# Altium PCB Motor_Drive.PcbDoc (part 2 of 2)
Units mil, origin at the board's own origin, x right, y up, seen from the top; angles counter-clockwise.
Board outline 4300 x 3900 mil, 4 copper layers (Top Layer, Power Plane, Ground Layer, Bottom Layer); 203 components, 137 nets, 620 pads, 244 vias.
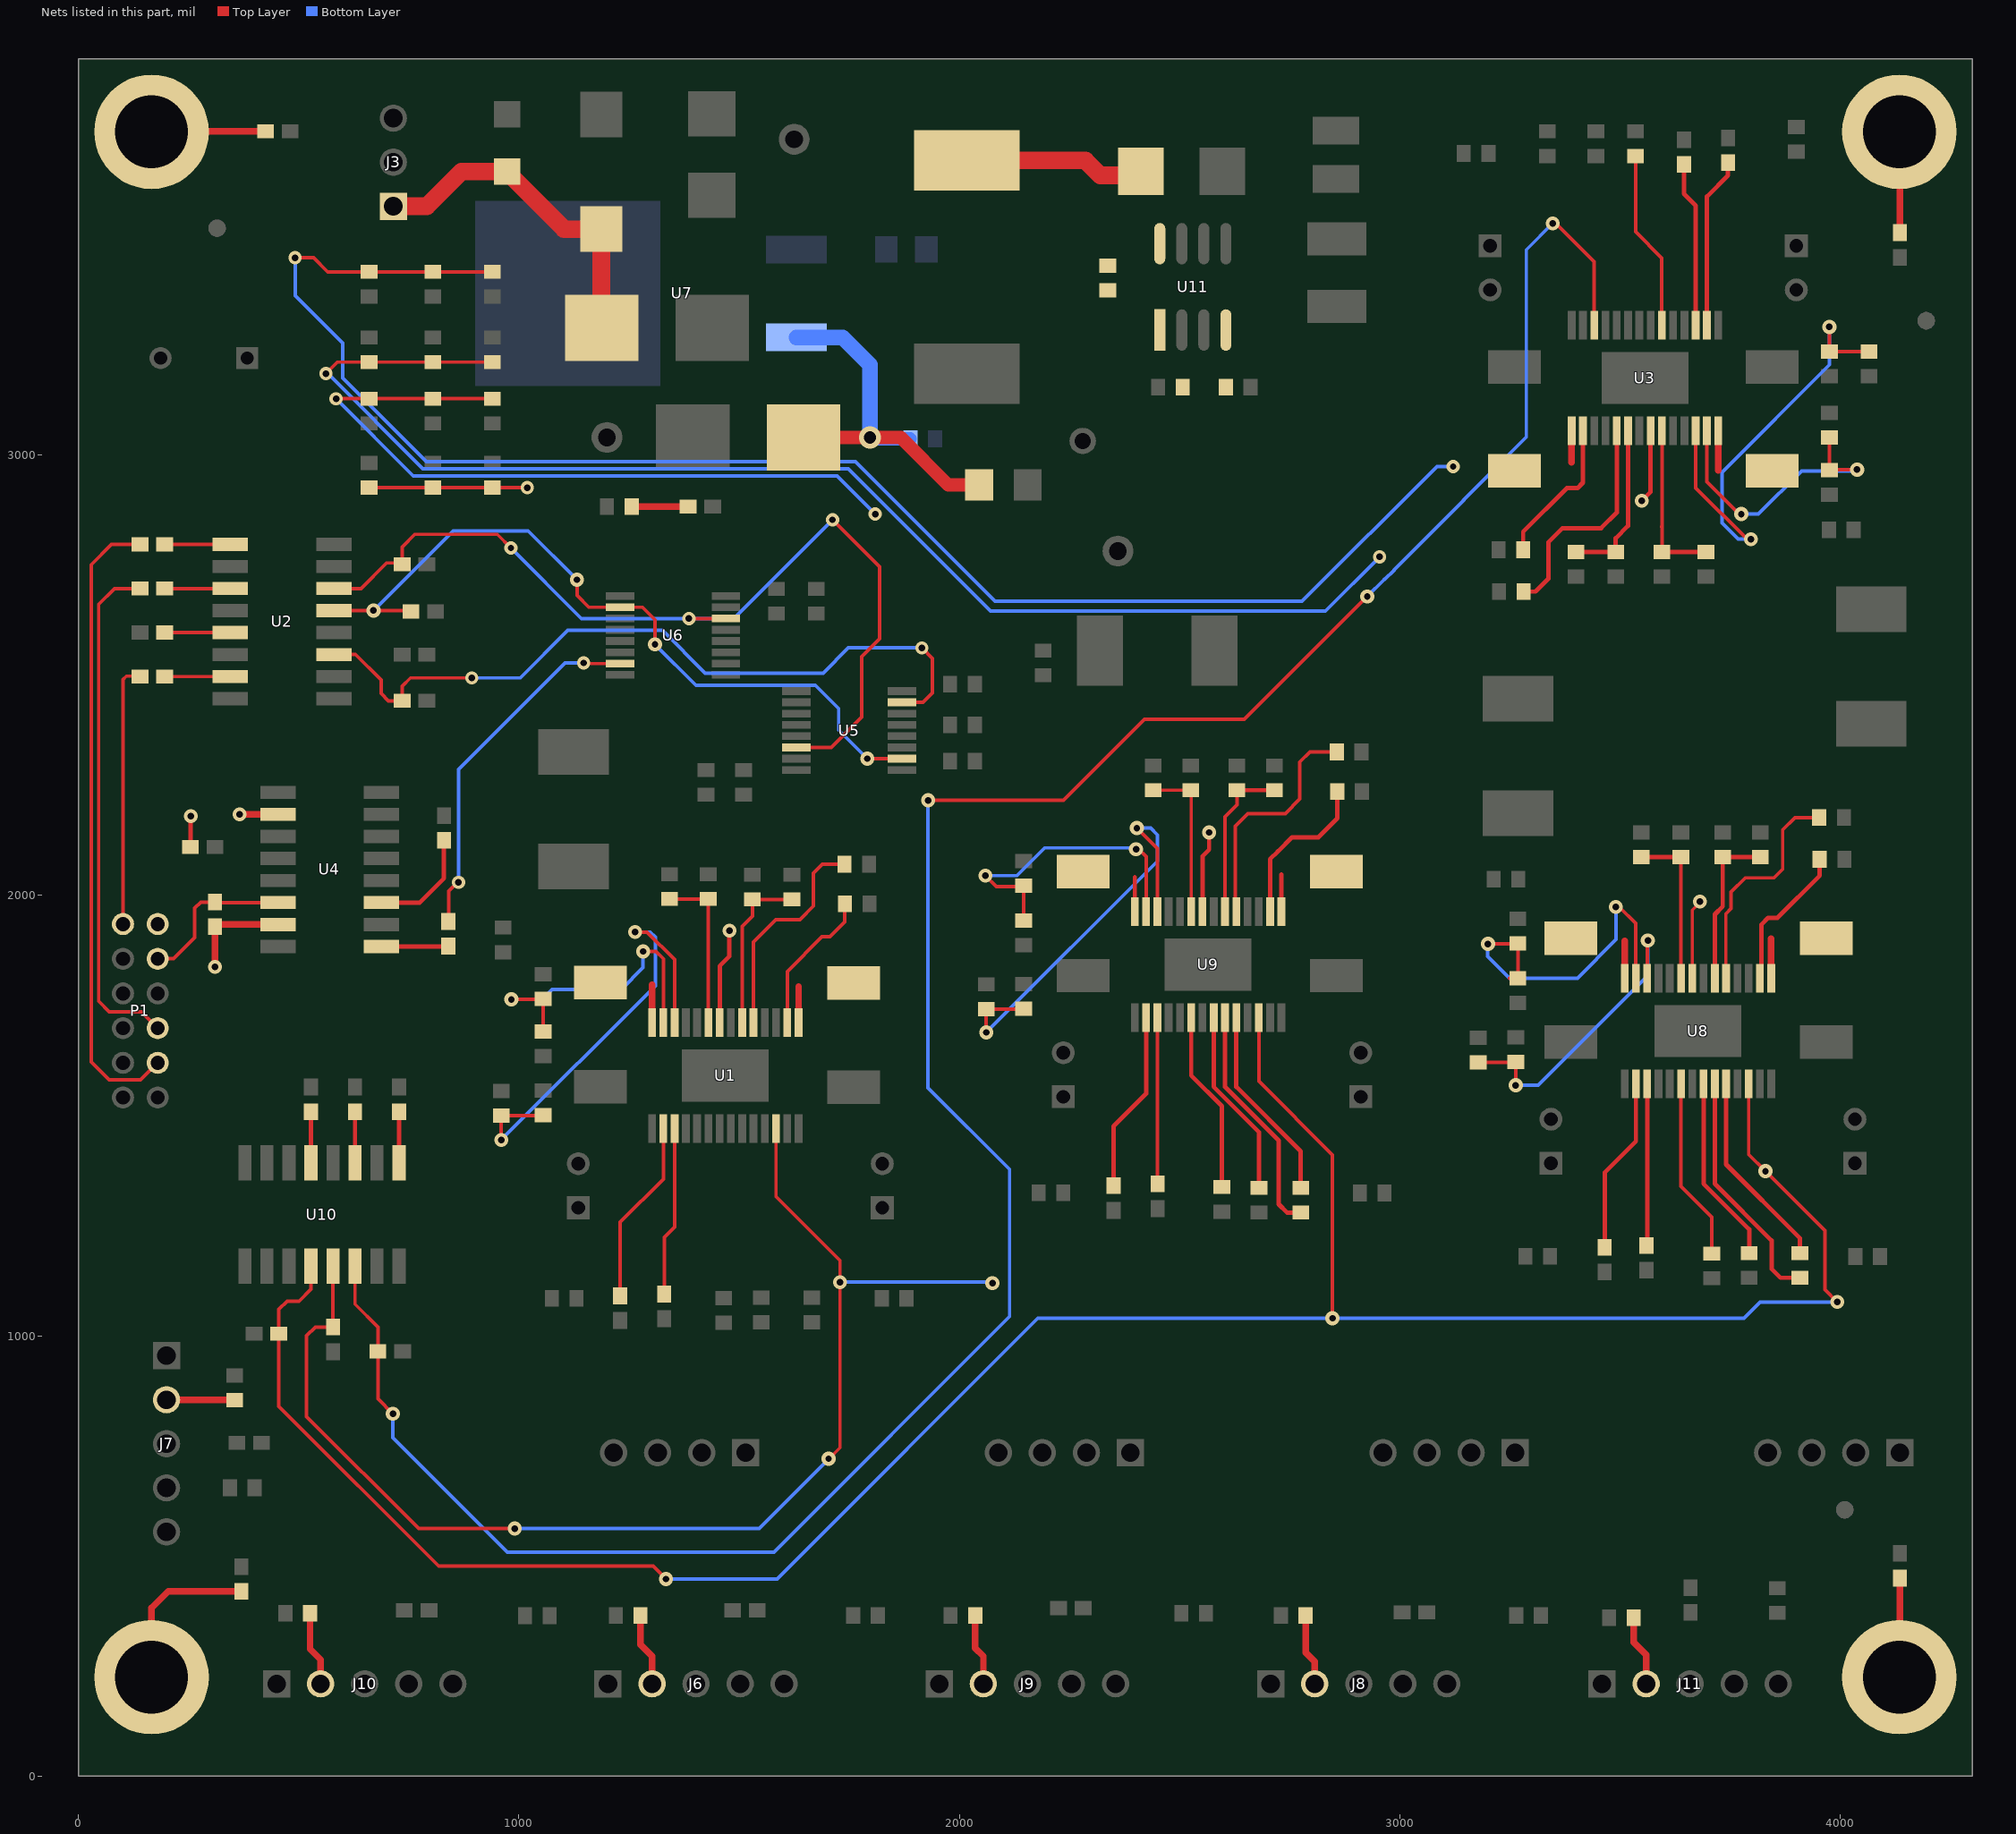
[diagram p4: the nets of this part, all layers, seen from the top]

## Via types
v1: diameter 32, hole 15, Top Layer to Bottom Layer, 136 vias
v2: diameter 50, hole 28, Top Layer to Bottom Layer, 49 vias
v3: diameter 30, hole 15, Top Layer to Bottom Layer, 25 vias
v4: diameter 32, hole 15, Top Layer to Bottom Layer, tented both sides, 15 vias
v5: diameter 30, hole 15, Top Layer to Bottom Layer, tented both sides, 10 vias
v6: diameter 20, hole 10, Top Layer to Bottom Layer, 8 vias
v7: diameter 50, hole 28, Top Layer to Bottom Layer, tented both sides, 1 vias

## Nets (pads, with @x,y where several pads share a name; then routed paths per layer and width w, separated by ;. In a path a pad name is that pad's centre, name@x,y a point inside that pad or via, vN(x,y) a via of type N, cw(c..) or ccw(c..) an arc to the next point about the centre after c; other vN are vias at no path point) (continued)
NetC18_1: C18.1 U3.20 | length 408.7
  Top Layer w8: C18.1@3535,3679 3535,3507 3594.72,3447.28 U3.20@3594.72,3295
NetC19_2: C19.2 U1.5 | length 507
  Top Layer w8: U1.5@1532.64,1711 1532.64,1894.64 1583,1945 1638,1945 1669,1976 1669,2051 1689,2071 C19.2@1739,2071
NetC20_2: C20.2 U3.5 | length 519.9
  Top Layer w10: C20.2@3281,2690 3308,2690 3337,2719 3337,2802 3369,2834 3457,2834 3492.36,2869.36 U3.5@3492.36,3055
NetC21_1: C21.1 R15.1 U1.6 | length 379.5
  Top Layer w8: U1.6@1507.05,1711 1507.05,1930.05 1530,1953 R15.1@1530,1991 C21.1@1620,1991
NetC22_1: C22.1 R16.1 U3.6 | length 376.6
  Top Layer w10: C22.1@3400,2780 R16.1@3490,2780 3490,2811 3517.95,2838.95 U3.6@3517.95,3055
NetC23_1: C23.1 R17.1 U1.9 | length 369.1
  Top Layer w8: C23.1@1342,1992 R17.1@1430,1992 1430,1711.28 U1.9@1430.28,1711
NetC24_1: C24.1 R18.1 U3.9 | length 375.6
  Top Layer w8: U3.9@3594.72,3055 3595,3054.72 3595,2838.4 3594.72,2838.13 3594.72,2836.28 3595,2836 R18.1@3595,2780
  Top Layer w10: R18.1@3594.72,2780 R18.1@3595,2780 C24.1@3695,2780
NetC29_1: C29.1 C30.P F2.1 J3.1 | length 784.4
  Top Layer w40: J3.1@715,3565 791,3565 870,3644 C29.1@972,3644 ; C29.1@973,3644 C29.1@972,3644 ; F2.1@1188,3289 1187,3290 C30.P@1187,3513 1103,3513 972.5,3643.5 C29.1@972,3644
NetC31_2: C31.2 F1.2 R93.2 U7.3 | length 866.5
  Top Layer w30: F1.2@1676,3040 v2@1794,3040 ; v2(1797,3040) 1867,3040 1975,2932 R93.2@2044.88,2932
  Bottom Layer w30: v2(1797,3040) 1794,3037 C31.2@1888,3037
  Bottom Layer w35: U7.3@1630,3267 1735,3267 1797,3205 v2(1797,3040)
NetC46_2: C46.2 U8.22 | length 426.9
  Top Layer w10: U8.22@3689.46,1572 3689.46,1345.54 3793,1242 C46.2@3793,1188
NetC47_2: C47.2 U9.22 | length 429.5
  Top Layer w10: U9.22@2577.46,1723 2577.46,1565.63 2680,1463.09 C47.2@2680,1336
NetC48_1: C48.1 U8.23 | length 545.7
  Top Layer w10: U8.23@3715.05,1572 3715.05,1345.41 3844,1216.46 3844,1152 3864,1132 C48.1@3908,1132
NetC48_2: C48.2 U8.24 | length 453.3
  Top Layer w10: U8.24@3740.64,1572 3740.64,1389.36 3908,1222 C48.2@3908,1188
NetC49_1: C49.1 U9.23 | length 532.4
  Top Layer w10: U9.23@2603.05,1723 2603.05,1565.5 2725,1443.54 2725,1299 2744,1280 C49.1@2775,1280
NetC49_2: C49.2 U9.24 | length 447.6
  Top Layer w10: U9.24@2628.64,1723 2628.64,1565.36 2775,1419 C49.2@2775,1336
NetC50_1: C50.1 U8.20 | length 413.9
  Top Layer w8: U8.20@3638.28,1572 3638.28,1339.72 3708,1270 C50.1@3708,1187
NetC51_1: C51.1 U9.20 | length 413.9
  Top Layer w10: U9.20@2526.28,1723 2526.28,1591.36 2596,1521.63 C51.1@2596,1338
NetC52_2: C52.2 U8.5 | length 523.4
  Top Layer w8: U8.5@3740,1812.64 3740,1958 3752,1970 3752,2008 3784,2040 3849,2040 3869,2060 3869,2149 3897,2177 C52.2@3952,2177
  Top Layer w10: U8.5@3740,1812.64 U8.5@3740.64,1812
NetC53_2: C53.2 U9.5 | length 545.3
  Top Layer w8: U9.5@2628.64,1963 2626,1965.64 2626,2157 2655,2186 2740,2186 2773,2219 2773,2303 2796,2326 C53.2@2857,2326
NetC54_1: C54.1 R51.1 U8.6 | length 367.4
  Top Layer w10: U8.6@3715.05,1812 3715.05,1957.09 3733,1975.04 R51.1@3733,2087 C54.1@3818,2087
NetC55_1: C55.1 R52.1 U9.6 | length 372.2
  Top Layer w8: U9.6@2603.05,1963 2603.05,2179.05 2630,2206 R52.1@2630,2239
  Top Layer w10: R52.1@2630,2239 C55.1@2715,2239
NetC56_1: C56.1 R53.1 U8.9 | length 365.1
  Top Layer w8: R53.1@3638,2087 3638.28,2086.72 U8.9@3638.28,1812
  Top Layer w10: C56.1@3548,2087 R53.1@3638,2087
NetC57_1: C57.1 R54.1 U9.9 | length 363.1
  Top Layer w8: C57.1@2440,2239 R54.1@2525,2239 ; R54.1@2523.87,2237.87 R54.1@2525,2239 ; U9.9@2526.28,1963 2526.28,2237.72 R54.1@2525,2239
NetC64_2: C64.2 R77.2 R78.2 U8.8 | length 3236.1
  Top Layer w8: v5(562,3185) 588,3211 C64.2@660,3211 R78.2@805,3211 R77.2@940,3211 ; U8.8@3663.87,1812 3663.87,1966.87 v1@3681,1984
  Top Layer w10: v1@3681,1984 v1(3681,1986)
  Bottom Layer w8: v5(562,3185) 566.18,3185 782.18,2969 1748,2969 2071,2646 2831,2646 v5(2954,2769)
NetC65_2: C65.2 R85.2 R87.2 U1.8 | length 577.2
  Top Layer w8: C65.2@660,2926 R87.2@805,2926 R85.2@940,2926 v5(1019,2926)
  Top Layer w10: U1.8@1455.87,1711 1455.87,1839.87 1478,1862 v1(1478,1920)
NetC66_2: C66.2 R86.2 R88.2 U3.8 | length 3804.1
  Top Layer w8: v5(492,3448) 534,3448 566,3416 C66.2@660,3416 R88.2@805,3416 R86.2@940,3416
  Top Layer w10: v1(3549,2896) 3569.13,2916.13 U3.8@3569.13,3055
  Bottom Layer w8: v5(492,3448) 492,3362 600,3254 600,3175 790,2985 1764,2985 2081,2668 2778,2668 3084,2974 v5(3121,2974)
NetC67_2: C67.2 R89.2 R90.2 U9.8 | length 1873.8
  Top Layer w8: v5(585,3128) C67.2@660,3128 R90.2@805,3128 R89.2@940,3128
  Top Layer w10: U9.8@2551.87,1963 2551.87,2088.87 2567,2104 v1(2567,2143)
  Bottom Layer w8: v5(585,3128) 760,2953 1722,2953 v3(1809,2866)
NetC68_1: C68.1 U11.1
NetC68_2: C68.2 D3.2 L1.1 U11.8 | length 414.2
  Top Layer w40: L1.1@2017,3669.03 2285.97,3669.03 2320,3635 2401,3635 2410,3644 D3.2@2412,3644 D3.2@2411,3645
NetD2_2: D2.2 R76.2 | length 128
  Top Layer w15: D2.2@1256,2883 R76.2@1384,2883
NetJ6_2: J6.2 R59.2 | length 165.9
  Top Layer w15: R59.2@1276,365 1276,299 1302.25,272.75 J6.2@1302.25,210
NetJ7_2: J7.2 R60.2 | length 155.4
  Top Layer w15: J7.2@200,855 354,855 R60.2@355,854
NetJ8_2: J8.2 R61.2 | length 163.6
  Top Layer w15: R61.2@2786,365 2786,281 2806.75,260.25 J8.2@2806.75,210
NetJ9_2: J9.2 R62.2 | length 162.7
  Top Layer w15: R62.2@2036,365 2036,291 2054.5,272.5 J9.2@2054.5,210
NetJ10_2: J10.2 R63.2 | length 169.9
  Top Layer w15: R63.2@526,370 526,289 550,265 J10.2@550,210
NetJ11_2: J11.2 R64.2 | length 161.6
  Top Layer w15: R64.2@3531,360 3531,304 3559,276 J11.2@3559,210
NetJ12_1: J12.1 R65.1 | length 259.4
  Top Layer w15: J12.1@166,3734 167,3735 R65.1@425,3735
NetJ13_1: J13.1 R66.1 | length 229.4
  Top Layer w15: J13.1@4134,3734 4135,3733 R66.1@4135,3505
NetJ14_1: J14.1 R67.1 | length 376.7
  Top Layer w15: J14.1@166,225 166,382 204,420 R67.1@370,420
NetJ15_1: J15.1 R68.1 | length 225.4
  Top Layer w15: J15.1@4134,225 4135,226 R68.1@4135,450
NetR1_2: R1.2 R11.1 U1.12 | length 1065.2
  Top Layer w8: v1(960,1445) R1.2@960,1500 1054,1500 R11.1@1055,1501 ; v1(1264,1917) 1291,1917 1353.5,1854.5 U1.12@1353.5,1711
  Bottom Layer w8: v1(960,1445) 1310,1795 1310,1905 1298,1917 v1(1264,1917)
NetR2_2: R2.2 R12.1 U1.13 | length 710.2
  Top Layer w8: v1(983,1764) 1054,1764 R2.2@1055,1765 R12.1@1055,1691 ; v1(1282,1873) 1311,1873 1327.91,1856.09 U1.13@1327.91,1711
  Bottom Layer w8: v1(983,1764) 1052,1764 1075,1787 1233,1787 1282,1836 v1(1282,1873)
NetR3_1: R3.1 U1.17 | length 385.7
  Top Layer w8: R3.1@1330,1095 1330,1224 1353.5,1247.5 U1.17@1353.5,1471
NetR4_2: R4.2 R13.1 U3.12 | length 1076.7
  Top Layer w8: U3.12@3671.5,3055 3671.5,2925.5 3788,2809 v1(3797,2809) ; v1(3975,3291) R13.1@3975,3235 R4.2@4065,3235
  Bottom Layer w8: v1(3797,2809) 3768,2809 3731,2846 3731,2961 3975,3205 v1(3975,3291)
NetR5_2: R5.2 R14.1 U3.13 | length 670.8
  Top Layer w8: U3.13@3697.09,3055 3697.09,2938.94 3770.03,2866 v1(3775,2866) ; R5.2@3975,2966 R14.1@3975,3040 ; R5.2@3976,2967 v1(4038,2967)
  Bottom Layer w8: v1(3775,2866) 3814,2866 3912,2964 v1@4045,2964
NetR6_1: R6.1 U3.17 | length 376
  Top Layer w10: R6.1@3645,3660 3645,3593 3671.5,3566.5 U3.17@3671.5,3295
NetR7_2: R7.2 U1.16 | length 420.6
  Top Layer w8: R7.2@1230,1091 1230,1258 1327.91,1355.91 U1.16@1327.91,1471
NetR8_1: R8.1 U1.2 | length 334.6
  Top Layer w8: U1.2@1609.41,1711 1609.41,1827.33 1688.08,1906 1706,1906 1740,1940 R8.1@1740,1981
NetR9_2: R9.2 U3.16 | length 388.8
  Top Layer w10: U3.16@3697.09,3295 3697.09,3587.09 3745,3635 R9.2@3745,3664
NetR10_1: R10.1 U3.2 | length 340.4
  Top Layer w10: R10.1@3280,2785 3280,2826 3379,2925 3403.38,2925 3415.59,2937.21 U3.2@3415.59,3055
NetR19_2: R19.2 U1.14 | length 86.7
  Top Layer w15: U1.14@1302.32,1711 1302.32,1797.68
NetR20_2: R20.2 U1.1 | length 82
  Top Layer w15: U1.1@1635,1711 1635,1793
NetR21_2: R21.2 U3.14 | length 90.3
  Top Layer w15: 3722.68,2964.68 U3.14@3722.68,3055
NetR22_2: R22.2 U3.1 | length 72
  Top Layer w15: 3390,2983 U3.1@3390,3055
NetR23_2: R23.2 U2.1 | length 149
  Top Layer w8: R23.2@196,2797 U2.1@345,2797
NetR26_2: R26.2 U2.3 | length 149
  Top Layer w8: R26.2@196,2697 U2.3@345,2697
NetR29_2: R29.2 U2.5 | length 149
  Top Layer w8: R29.2@196,2597 U2.5@345,2597
NetR30_2: R30.2 U2.7 | length 149
  Top Layer w8: R30.2@196,2497 U2.7@345,2497
NetR31_2: R31.2 U10.1 | length 116
  Top Layer w10: U10.1@728,1393 R31.2@728,1509
NetR32_1: R32.1 U4.1 | length 137.4
  Top Layer w10: U4.1@688,1884 824,1884 R32.1@825,1885
NetR36_1: R36.1 U4.3 | length 250.8
  Top Layer w10: U4.3@688,1984 775,1984 830,2039 R36.1@830,2125
NetR37_2: R37.2 R47.1 U8.12 | length 698.2
  Top Layer w8: R37.2@3178,1621 3262,1621 R47.1@3263,1622 v1(3263,1569) ; v1@3560,1888 3561.5,1886.5 U8.12@3561.5,1812
  Bottom Layer w8: v1(3263,1569) 3314,1569 3563,1818 v1(3563,1898)
NetR38_2: R38.2 R48.1 U8.13 | length 803.3
  Top Layer w8: v1(3200,1890) R38.2@3267,1890 ; R48.1@3249,1812 R48.1@3268,1812 R38.2@3268,1891 ; v1(3490,1974) 3498,1974 3535,1937 3535,1812.91 U8.13@3535.91,1812
  Bottom Layer w8: v1(3200,1890) 3199,1889 3199,1862 3249,1812 3403,1812 3491,1900 3491,1974 v1(3490,1974)
NetR39_1: R39.1 U8.17 | length 368.4
  Top Layer w10: U8.17@3561.5,1572 3561.5,1208.5 3562.5,1207.5 R39.1@3565,1205
NetR40_2: R40.2 R49.1 U9.12 | length 1010.7
  Top Layer w8: v1(2061,1689) R40.2@2061,1742 2145,1742 R49.1@2146,1743 ; v1(2403,2153) 2449.5,2106.5 2449.5,2036.5 ; U9.12@2449.5,1963 2449.5,2036.5 ; 2450,2037 2449.5,2036.5
  Bottom Layer w8: v1(2061,1689) 2449.5,2077.5 2449.5,2137.5 2434,2153 v1(2403,2153)
NetR41_2: R41.2 R50.1 U9.13 | length 705.2
  Top Layer w8: v1(2059,2045) 2084,2020 2144,2020 R41.2@2146,2022 R50.1@2146,1943 ; v1(2401,2105) 2401,2107 2402,2108 2404,2108 2423.91,2088.09 U9.13@2423.91,1963
  Bottom Layer w8: v1(2059,2045) 2131,2045 2194,2108 2398,2108 v1(2401,2105)
NetR42_1: R42.1 U9.17 | length 378.2
  Top Layer w8: U9.17@2449.5,1723 2450,1722.5 R42.1@2450,1345
NetR43_2: R43.2 U8.16 | length 401.7
  Top Layer w10: R43.2@3473,1203 3470,1206 3465,1211 3465,1371 3535.91,1441.91 U8.16@3535.91,1572
NetR44_1: R44.1 U8.2 | length 338.7
  Top Layer w10: U8.2@3817.41,1812 3821,1815.59 3821,1934.38 3835.62,1949 3857,1949 3953,2045 R44.1@3953,2082
NetR45_2: R45.2 U9.16 | length 412.6
  Top Layer w10: R45.2@2350,1341 2350,1476 2423.91,1549.91 U9.16@2423.91,1723
NetR46_1: R46.1 U9.2 | length 371.4
  Top Layer w10: U9.2@2705.41,1963 2705.41,2082.37 2723,2099.96 ; 2723,2100 2755,2132 2815,2132 2858,2175 R46.1@2858,2236
NetR55_2: R55.2 U8.14 | length 84.7
  Top Layer w15: U8.14@3510.32,1812 3510.32,1896.68
NetR56_2: R56.2 U8.1 | length 90
  Top Layer w15: U8.1@3843,1812 3843,1902
NetR57_2: R57.2 U9.14 | length 78.3
  Top Layer w10: U9.14@2398.32,1963 2398.32,2041.32
NetR58_2: R58.2 U9.1 | length 85
  Top Layer w10: U9.1@2731,1963 2731,2048
NetR73_2: R73.2 U10.3 | length 116
  Top Layer w10: U10.3@628,1393 R73.2@628,1509
NetR75_2: R75.2 U10.5 | length 116
  Top Layer w10: U10.5@528,1393 R75.2@528,1509
NetR91_1: R91.1 R92.1 U11.4
OPEN: R32.2 U6.7 | length 821.5
  Top Layer w8: R32.2@841,1942 841,2010 861,2030 v3(863,2030) ; v3@1147,2526.46 U6.7@1230,2526.46
  Bottom Layer w8: v3(863,2030) 863,2286 1105,2528 v3(1147,2528)
OPEN_OUT: P1.3 R34.1 U4.14 | length 366
  Top Layer w8: P1.3@180,1856.26 216.26,1856.26 264,1904 264,1971 278,1985 R34.1@310,1985 311,1984 U4.14@453,1984
S0: R24.1 U2.14 U5.14 U6.14 | length 2154.5
  Top Layer w8: U2.14@580,2697 642,2697 700,2755 732,2755 R24.1@735,2752 735,2791 764,2820 951,2820 v3(982,2789) ; v5(1386,2628.82) U6.14@1470,2628.82 U6.14@1466.82,2632 ; U5.14@1630,2336.18 1709.18,2336.18 1778,2405 1778,2542 1819,2583 1819,2746 v3(1712,2853)
  Bottom Layer w8: v3(982,2789) 1142,2629 1488,2629 v3(1712,2853)
S0_IN: P1.9 R23.1 | length 1443.2
  Top Layer w8: R23.1@140,2797 75,2797 29,2751 29,1622 69.96,1581.04 141,1581.04 P1.9@180,1620.04
S1: R25.1 U2.13 U5.2 U6.2 | length 1915.6
  Top Layer w8: U2.13@546,2647 U2.13@580,2647 ; v1(1132,2717) 1132,2681 1158.59,2654.41 U6.2@1230,2654.41 1280.59,2654.41 1309,2626 v4(1309,2570) ; v4(1791,2310.59) U5.2@1870,2310.59 ; U2.13@580,2647 735,2647 702,2647 U2.13@580,2647
  Bottom Layer w8: v1(670,2647) 851,2828 1021,2828 v1(1132,2717) ; v4(1309,2570) 1402,2477 1673.14,2477 1726,2424.14 1726,2375.59 v4(1791,2310.59)
S1_IN: P1.7 R26.1 | length 1169.3
  Top Layer w8: R26.1@140,2697 82,2697 46,2661 46,1760 70.22,1735.78 143,1735.78 P1.7@180,1698.78
STEP: R28.1 U2.11 U5.7 | length 1727.3
  Top Layer w8: U2.11@580,2547 629,2547 687,2489 687,2459 704,2442 R28.1@727,2442 ; R28.1@735,2442 735,2475 754,2494 779,2494 v3(893,2494) ; U5.7@1870,2438.54 1917.54,2438.54 1939,2460 1939,2538.12 v3(1915,2562.12)
  Bottom Layer w8: v3(893,2494) 1003,2494 1110.82,2601.82 1326.18,2601.82 1423,2505 1690.63,2505 1747.74,2562.12 v3(1915,2562.12)
STEP_IN: P1.2 R30.1 | length 597.6
  Top Layer w8: P1.2@101.26,1935 101.26,2490.26 109,2498 139,2498 R30.1@140,2497
VCC: P1.1 R34.2 R35.2 U4.10 U4.15 | length 405.6
  Top Layer w10: R35.2@255,2106 v1(255,2180) ; R34.2@304,1935 R34.2@310,1929 R34.2@315,1934
  Top Layer w15: v1(310,1838) R34.2@310,1929 ; R34.2@315,1934 U4.15@453,1934 ; v1(366,2184) U4.10@453,2184
~DOOR_EN: R74.1 U8.26 U9.26 U10.12 | length 5655.5
  Top Layer w8: U10.12@528,1158 528,1106 501,1079 474,1079 455,1060 455,1020 455,840 818,477 1305,477 v1(1334,448) ; U9.26@2679.82,1723 2679.82,1578.18 2847,1411 v1(2847,1040) ; U8.26@3791.82,1572 3791.82,1412.18 v1(3830,1374) 3965,1239 3965,1105 v1(3993,1077)
  Bottom Layer w8: v1(1334,448) 1586,448 2178,1040 v1(2847,1040) 3781,1040 3818,1077 v1(3993,1077)
~FILTER_EN: R33.1 U3.26 U10.14 | length 5886.5
  Top Layer w8: U10.14@628,1158 628,1072 680,1020 R33.1@680,965 680,857 v1(714,823) ; v1(1929,2216) 2236,2216 2420,2400 2647,2400 v1(2926,2679) ; v1@3350.5,3529.5 3441.18,3438.82 U3.26@3441.18,3295
  Bottom Layer w8: v1(714,823) 714,769 974,509 1579,509 2114,1044 2114,1378 1929,1563 v1(1929,2216) ; v1(2926,2679) 2965.02,2718.02 2966.02,2718.02 2986.64,2738.64 2986.64,2739.64 3145,2898 3144.22,2898 3287,3040.78 3287,3466 v1(3347,3526)
~LID_EN: R72.1 U1.26 U10.13 | length 3018.3
  Top Layer w8: 578,1054 U10.13@578,1158 R72.1@578,1020 538,1020 518,1000 518,817 772.5,562.5 v1(990.5,562.5) ; U1.26@1583.82,1471 1583.82,1316.18 1729,1171 1729,746 1704,721 v1(1703,721)
  Bottom Layer w8: v1(990.5,562.5) 1545.5,562.5 1703,720 v1(1703,721) ; v1(1729,1122) 2073,1122 v1(2075,1120)
pads on no net: F3.1 F4.1 F5.1 P1.6 U4.5 U4.6 U4.7 U4.8 U4.11 U4.12 U10.7 U10.8 U10.11 U11.2 U11.3 U11.5

## Polygon pours and split planes (outlines as drawn)
D on Top Layer "Top Layer GND" (solid, remove dead copper, pour order 1007): 10,3575 10,411 11.47,412.47 348,412.47 348,33.25 348.75,34 3966,34 3966,458 3958,466 3958.47,466.47 4268.75,466.47 4268.75,3539 4257.75,3550 3985,3550 3985,3863.75 3981,3867.75 345,3867.75 345,3576 344,3575 335,3566 23.25,3566
D on Top Layer "UU3 GND Top Layer" (solid, remove dead copper, pour order 1006): 3041,3871 3041,2586 3078,2549 3078,2547 3512,2547 3739,2320 3741.5,2322.5 4190,2322.5 4190,3258 3985,3463 3981,3467 3981,3869.75 3042.25,3869.75 3041,3871
NetC68_1 on Top Layer "CB Cap" (solid, remove dead copper, pour order 1010): 2178,3461 2178,3278 2397,3278 2397,3461 2178,3461
NetR91_1 on Top Layer "Voltage Divider" (solid, remove dead copper, pour order 1013): 2501,3407.5 2501,3273 2412,3273 2398,3259 2397,3258 2397,3170 2516.5,3170 2551,3204.5 2551,3407.5 2501,3407.5
D on Top Layer "U1 Vref Ground" (solid, pour order 1001): 501,3023 501,2915 590,2915 622,2883 623,2884 1061,2884 1061,3023 501,3023
D on Top Layer "U9 Vref Ground" (solid, pour order 1006): 503,3165 503,3031 504,3032 1062,3032 1062,3164 1061,3165 503,3165
D on Top Layer "U8 Vref Ground" (solid, pour order 1011): 464,3310 465,3309 465,3176 1060,3176 1062,3174 1058,3178 1058,3310 464,3310
D on Top Layer "U3 Vref Ground" (solid, pour order 1014): 463,3464 463,3319 1002,3319 1003,3318 1003,3504 899,3504 898,3503 859,3464 463,3464
D on Top Layer "Top Layer U1 D" (solid, remove dead copper, pour order 1015): 933,2431.96 933,2148.43 933,2141.3 891,2098.46 897,2092.34 897,1842.47 897,1834.31 827,1762.92 823,1758.84 823,792 1896,792 2040,938.86 2046,944.98 2046,1353.95 2046,1372.31 2005,1414.12 1954,1466.14 1954,2065.82 1943,2065.82 1841,2169.85 1820,2191.27 1378,2191.27 1378,2409.52 1354,2434 1348,2427.88 958,2427.88
D on Top Layer "Top Layer U9 D" (solid, remove dead copper, pour order 1012): 2096,2721 2097,2720 2097,2353 2103,2353 2141,2315 2141,2261 2098,2261 1958,2121 1954,2117 1954,1576 1954,1500 2080,1374 2082,1372 2082,1220 2082,1161 2214,1029 2226,1017 3009,1017 3009,1695 3031,1717 3031,2573 2946,2573 2798,2721 2096,2721
D on Top Layer "Top Layer U8 D" (solid, remove dead copper, pour order 1007): 3046,2536 3046,1391 3046,1387 3216,1217 3219,1214 3219,1051 3220,1051 3250,1021 3261,1010 3595,1010 3602,1010 3668,944 3670,946 4225,946 4225,2260 4172,2313 3733,2313 3509,2537 3046,2537
GND_IN on Top Layer "Top Layer GNDIN" (solid, remove dead copper, pour order 1003): 101,2984 24,2907 24,2905 24,1265 22,1263 804,1263 804,1633 573,1864 573,2328 472,2429 472,2889 375,2986 373,2984 101,2984
+8V on Top Layer "8V Top Layer" (solid, remove dead copper, pour order 1005): 1841.1,3304.9 1843.1,3302.9 1843.1,3081.9 1896.1,3081.9 1901.1,3081.9 1988.1,2994.9 1991.1,2991.9 2100.1,2991.9 2108.1,2983.9 2108.1,2875.9 2116.1,2867.9 2380.1,2867.9 2410.1,2867.9 2437.1,2894.9 2452.1,2909.9 2987.1,2909.9 2987.1,3391.9 2980.1,3398.9 2744.1,3398.9 2744.1,3049.9 2740.1,3045.9 2634.1,3045.9 2531.1,3045.9 2478.1,3098.9 2482.1,3102.9 2482.1,3210.74 2262.26,3210.74 2168.1,3304.9 1841.1,3304.9
NetR91_1 on Top Layer "Voltage Divder" (solid, remove dead copper, pour order 1004): 2574,3378 2574,3236 2564,3226 2551,3213 2480,3213 2480,3101 2481,3100 2484,3103 2631,3103 2631,3377 2630,3378 2574,3378
D on Top Layer "switcher gnd" (solid, remove dead copper, pour order 1003): 2524,3762 2524,3393 2539,3378 2643,3378 2632,3367 2632,3040 2738,3040 2742,3044 2742,3407 2782,3407 2805,3430 2807,3432 3028,3432 3027,3433 3027,3679 3017,3689 2728,3689 2728,3699 2665,3762 2524,3762
NetC68_1 on Top Layer "CB2" (solid, remove dead copper, pour order 1002): 2269,3399 2269,3236 2292,3213 2480,3213 2484,3217 2484,3399 2269,3399
NetC68_2 on Top Layer "CB1" (solid, remove dead copper, pour order 1001): 1792.33,3762 1792.33,3626.67 2016,3403 2019,3400 2476,3400 2486,3410 2486,3762 1792.33,3762
+24V on Top Layer "24V top" (solid, remove dead copper, pour order 1000): 1522,3865 1522,3645 1442,3645 1361,3564 1361,3175 1535,3175 1636,3276 1792.32,3432.32 1792.32,3761.99 1792.33,3762 2486,3762 2486,3429 2524,3429 2524,3762 2699,3762 2701,3764 2701,3731 2740,3692 2928,3692 2963,3727 2963,3860 2964,3861 1523,3861 1522,3860
D on Bottom Layer "U8 Vref Ground" (solid, pour order 1020): 465,3309 465,3176 1056,3176 1058,3178 1058,3310 465.41,3310
D on Bottom Layer "U9 Vref Ground" (solid, pour order 1022): 503,3165 503,3032.41 1060.41,3032.41 1061,3033 1062,3034 1062,3164 504,3164 503,3165
D on Bottom Layer "U1 Vref Ground" (solid, pour order 1024): 501,3023 501,2915 590,2915 621,2884 1061,2884 1061,3023 501,3023 501,2915
D on Bottom Layer "Bottom Layer U1 D" (solid, remove dead copper, pour order 1025): 970,2412 970,2261 969,2260 932,2223 932,2222 932,2143 899,2110 895.06,2110 895.06,1845.06 895,1845 822,1772 822,866 863,825 1705,825 2037,825 2041,821 2049,829 2049,1362 2049,1383 1915,1517 1914,1518 1914,2067 1914,2075 1835,2154 1833,2152 1402,2152 1367,2187 1371,2191 1371,2437 995,2437 970,2412
D on Bottom Layer "Bottom Layer U9 D" (solid, remove dead copper, pour order 1023): 2096,2725 2096,2358 2097,2357 2141,2313 2141,2259 2138,2262 2099,2262 1999,2162 2008,2153 2008,1419 2008,1415 2071,1352 2081,1342 2081,1160 2084,1160 2225,1019 2227,1017 3009,1017 3009,1699 3030,1720 3028,1722 3028,2572 2942,2572 2940,2574 2795,2719 2795,2725 2096,2725
D on Bottom Layer "BottomLayer U8 D" (solid, remove dead copper, pour order 1021): 3049,2536 3049,1536 3049,1386 3204,1231 3219,1216 3219,1040 3572,1040 3662,950 3665,947 4222,947 4222,2264 4175,2311 3758,2311 3734,2311 3512,2533 3509,2536 3049,2536
D on Bottom Layer "Bottom Layer U3 D" (solid, remove dead copper, pour order 1018): 3000,3868 2996,3864 2996,2718 2996,2695 3093,2598 3131,2560 3752,2560 3752,2431 3852,2331 3855,2328 4213,2328 4213,3170 3993,3390 3972,3411 3972,3645 3972,3751 3857,3866 3855,3868 3000,3868
GND_IN on Bottom Layer "Bottom Layer GNDIN" (solid, remove dead copper, pour order 1008): 102,2981 27,2906 25,2906 25,1265 801,1265 801,1629 799,1631 570,1860 570,1865 570,2324 470,2424 470,2425 470,2888 468,2890 377,2981 369,2981 102,2981
D on Bottom Layer "Bottom Layer D" (solid, remove dead copper, pour order 1009): 345,3881 345,3566 10,3566 20,3556 20,413 342,413 345,416 348,413 348,32 3943,32 3961,50 3958,53 3958,466 4260,466 4266,460 4269,463 4269,3539 4013,3539 4010,3542 3992,3560 3981,3560 3981,3872 3972,3881 345,3881
D on Bottom Layer "U3 Vref GND" (solid, remove dead copper, pour order 1000): 464,3463 466,3461 466,3323 843,3323 848,3318 851,3321 851,3464 465,3464 464,3463
+5V on Power Plane (split plane): 4279.9,20.1 20.1,20.1 20.1,3879.9 4279.9,3879.9
+24V on Power Plane (split plane): 163 vertices, not listed, extent 286.1,911.1 4267.9,3854.9
VCC on Power Plane (split plane): 463.9,2888.89 463.9,2430 464.29,2428.05 465.4,2426.4 568.9,2322.89 568.9,1864 569.29,1862.05 570.4,1860.4 795.9,1634.89 795.9,1266.1 31.1,1266.1 31.1,2897 31.1,2904.89 107.11,2980.9 371.89,2980.9
NetC64_2 on Power Plane (split plane): 3741.9,2277.89 3741.9,2096.5 3741.9,1937.1 3663.11,1937.1 3643.37,1956.84 3643.37,2026 3643.37,2224.72 3642.99,2226.67 3641.88,2228.33 3164.6,2705.6 3162.95,2706.71 3161,2707.1 2935.11,2707.1 2895.1,2747.11 2895.1,2788.89 2915.11,2808.9 3210.89,2808.9
NetC65_2 on Power Plane (split plane): 1070.9,2957.89 1070.9,2427 1071.29,2425.05 1072.4,2423.4 1550.9,1944.89 1550.9,1867.11 1541.89,1858.1 1435.1,1858.1 1435.1,1941 1434.71,1942.95 1433.6,1944.6 1370.6,2007.6 960.1,2418.11 960.1,2945.89 991.11,2976.9 1051.89,2976.9
NetC67_2 on Power Plane (split plane): 2526.4,2477.4 2618.9,2384.89 2618.9,2206 2618.9,2080.1 2523.1,2080.1 2523.1,2246 2523.1,2365 2522.71,2366.95 2521.6,2368.6 2454.61,2435.6 2454.6,2435.6 2081.6,2808.6 2079.95,2809.71 2078,2810.1 1780.11,2810.1 1751.1,2839.11 1751.1,2896.89 1772.11,2917.9 2085.89,2917.9
NetC66_2 on Power Plane (split plane): 3602.9,2917.89 3602.9,2859.11 3577.89,2834.1 3518.11,2834.1 3434.6,2917.6 3432.95,2918.71 3431,2919.1 3097.11,2919.1 3071.1,2945.11 3071.1,3023.9 3496.89,3023.9
D on Ground Layer (split plane): 4279.9,20.1 20.1,20.1 20.1,3879.9 4279.9,3879.9
GND_IN on Ground Layer (split plane): 463.9,2883.89 463.9,2424 464.29,2422.05 465.4,2420.4 564.9,2320.89 564.9,1858 565.29,1856.05 566.4,1854.4 794.9,1625.89 794.9,1270.1 31.1,1270.1 31.1,2900.89 106.11,2975.9 371.89,2975.9

## Keep-outs
Keep-Out Layer:
  lines w10: 12,16 12,3887 4285,3887 4285,16 12,16
  text "Keep-Out Layer" at 2934,-1959.99 h120
  text "9" at 5023.97,-1976 h120

## Other copper
Top Layer:
  rectangle net NetR19_2: 1122,1777 1310,1825
  rectangle net NetR20_2: 1627,1775 1824,1823
  rectangle net NetR57_2: 2217,2027 2405,2075
  rectangle net NetR58_2: 2725,2029 2920,2077
  rectangle net NetR55_2: 3323,1878 3519,1926
  rectangle net NetR56_2: 3834,1880 4034,1928
  rectangle net +24V: 1065,1129 1177,1239
  rectangle net +24V: 1777,1132 1882,1238
  rectangle net +24V: 2157,1376 2287,1490
  rectangle net +24V: 2859,1379 2971,1496
  rectangle net +24V: 3271,1227 3390,1333
  rectangle net +24V: 3977,1228 4083,1342
  rectangle net NetR21_2: 3715,2938 3909,2986
  rectangle net NetR22_2: 3194,2938 3398,2986
  rectangle net +24V: 3854,3532 3959,3638
  rectangle net +24V: 3149,3532 3254,3638
  region net +24V: 1064,1237 1064,1341 1182,1341 1266,1425 1312,1425 1312,1373 1176,1237
  region net +24V: 2157,1489 2157,1589 2271,1589 2359,1677 2408,1677 2408,1610 2287,1489
  region net +24V: 3271,1333 3271,1438 3390,1438 3473,1521 3521,1521 3521,1464 3390,1333
  region net +24V: 1883.55,1236.45 1878,1242 1878,1343 1758,1343 1677,1424 1625,1424 1625,1388 1777.55,1235.45
  region net +24V: 2971,1495 2970,1496 2970,1586 2861,1586 2769,1678 2720,1678 2720,1633 2859.06,1493.94
  region net +24V: 3960,3534 3960,3426 3838,3426 3758,3346 3713,3346 3713,3396 3851,3534
  region net +24V: 4084,1341 4083,1342 4083,1443 3963,1443 3882,1524 3832,1524 3832,1486 3978,1340
  region net +24V: 3148,3532 3149,3531 3149,3427 3272,3427 3350,3349 3400,3349 3400,3387 3254,3533
  text "Top Layer" at 2934,-1959.99 h120
  text "1" at 5063.95,-1976 h120
Bottom Layer:
  text "PCBS-GEN-0905 RevD" at 3026,530 h60
  text "Bottom Layer" at 2934,-1959.99 h120
  text "4" at 5023.97,-1976 h120
Power Plane (plane layer: these items are gaps in the copper):
  lines w10: 1864,1348 1763,1348 1661,1246 1546,1246 1278,1246 1173,1351 1088,1351 1070,1333 1068,1333 1034,1299 1034,1239 1034,1154 1109,1079 1265,1079 1367,977 1367,906 4093,906 4121,906 4132.67,906 4273,1046.33 4273,3426.61 4273,3433 4194.8,3511.2 4133,3573 4019,3573 3896,3696 3756,3696 3592,3860 2993,3860 2733,3860 2512,3860 1651,3860 1491,3860 991,3360 281,3360 281,3204 281,3067 279,3065 462,3065 464,3067 464,3138 530,3204 1318,3204 1526,3204 1544,3204 1761,3421 3262,3421 3316,3475 3316,3630 3538.5,3630 3715.5,3453 3828,3453 3861,3420 3945,3420 4107,3258 4107,1482 4075,1450 4009,1450 3965,1406 3965,1194 3805,1034 3525,1034 3413,1146 3413,1425 3391,1447 3292,1447 3258,1413 3258,1188 3258,1072 3255,1075 2986,1075 2982,1071 2982,1338 2982,1574 2952,1604 2870,1604 2843,1577 2843,1163 2310,1163 2310,1560 2268,1602 2180,1602 2141,1563 2141,1359 2141,1075 2137,1071 2118,1071 1969,1071 1902,1138 1902,1319 1872,1349 ; 3638.28,2025 3638.28,2224.72 3161,2702 2933,2702 2890,2745 2890,2791 2913,2814 3213,2814 3747,2280 3747,2096.5 3747,1935.23 3745.66,1932 3661,1932 3638.28,1954.72 3638.28,2026 ; 26,1261 802,1261 801,1262 801,1637 574,1864 574,2325 469,2430 469,2891 374,2986 105,2986 26,2907 26,2897 26,1261 ; 955,2416 955,2948 989,2982 1054,2982 1076,2960 1076,2427 1556,1947 1556,1865 1544,1853 1430,1853 1430,1941 1367,2004 955,2416 ; 1746,2837 1778,2805 2078,2805 2451,2432 2518,2365 2518,2246 2518,2075 2624,2075 2624,2206 2624,2387 2530,2481 2088,2923 1770,2923 1746,2899 1746,2837 ; 3066,2943 3066,3029 3499,3029 3608,2920 3608,2857 3580,2829 3516,2829 3431,2914 3095,2914 3066,2943
  text "Power Layer" at 2934,-1959.99 h120
  text "2" at 5023.97,-1976 h120
Ground Layer (plane layer: these items are gaps in the copper):
  lines w10: 26,1265 800,1265 800,1628 570,1858 570,2323 469,2424 469,2886 374,2981 104,2981 26,2903 26,1265
  text "Ground Layer" at 2934,-1959.99 h120
  text "3" at 5023.97,-1976 h120

## Silkscreen, mask and mechanical layers (free items; w line width, h text height)
Top Overlay:
  rectangle: 2916,906 3213,999
  text "+24V" at 435,3555 h40
  text "+24V" at 1561,3533 h40
  text "U3" at 1003,3458.55 h40
  text "Vref" at 993,3384 h40
  text "U8" at 1027,3222 h40 r90
  text "Vref" at 1080,3222 h40 r90
  text "U9" at 1034.7,3023 h40 r90
  text "Vref" at 1102,3022 h40 r90
  text "+8V" at 2350,2953 h40
  text "U1" at 1054,2894 h40
  text "Vref" at 1005,2828 h40
  text "GND" at 2473,2761 h40
  text "LID" at 48,1205 h60
  text "Open" at 45,1105 h60
  text "Motor Drive Board" at 2178,1019 h60
  text "PCBA-SUB-0905" at 2094,920 h60
  text "Door" at 1756,830 h60
  text "LID" at 960,815 h60
  text "FLTR" at 3511,792 h60
  text "Door" at 2627,791 h60
  text "MTR1" at 1760,731 h60
  text "MTR" at 961,715 h60
  text "MTR2" at 2627,692 h60
  text "MTR" at 3535,681 h60
  text "FLTR HOME" at 3432,534 h60
  text "Door Closed" at 1999,532 h60
  text "Door Open" at 1193,520 h60
  text "FLTR POS" at 2763,502 h60
  text "LID Closed" at 520,492 h60
  text "Top Silk" at 2934,-1959.99 h120
  text "5" at 5023.97,-1976 h120
Bottom Overlay:
  text "Bottom Silk" at 2934,-1959.99 h120
  text "6" at 5023.97,-1976 h120
Top Solder:
  text "Top Solder Mask" at 2934,-1959.99 h120
  text "7" at 5023.97,-1976 h120
Bottom Solder:
  text "Bot Solder Mask" at 2934,-1959.99 h120
  text "8" at 5023.97,-1976 h120
Mechanical 1:
  lines w10: -228,60 -208,0 ; -228,3840 -208,3900 ; -218,0 -198,0 ; -218,3900 -198,3900 ; -208,1669.09 -208,0 ; -208,2230.91 -208,3900 ; -188,60 -208,0 ; -188,3840 -208,3900 ; 0,-90 0,-70 ; 60,-100 0,-80 ; 60,-60 0,-80 ; 1869.09,-80 0,-80 ; 2430.91,-80 4300,-80 ; 4240,-100 4300,-80 ; 4240,-60 4300,-80 ; 4300,-90 4300,-70
  text "3900 (mil)" at -172.01,1679.09 h60 r90
  text "4300 (mil)" at 1879.09,-115.99 h60
Mechanical 15:
  lines w8: -4951,-682 1308,-682 ; -4951,-252 5594,-251 -692,-252 ; -4940,-2016 5594,-2016 5594,5759 ; -4936,-2016 -5491,-2016 -5491,5760.05 5611,5759 ; -2442,-2016 -2442,-685 ; -2440,-1122 1308,-1122 ; -2436,-1342 -693,-1342 ; -2436,-902 -693,-902 ; -2435.5,-1781 -1585.5,-1781 ; -2433.5,-1566 -1581,-1566 ; -1581,-2016 -1581,-1675 ; -1580,-1681 -1580,-677 ; -698,-1562 1308,-1562 ; -692,-2011 -692,-252 ; -692,-2002 -692,-252 ; 86,4740 86,4990 ; 86,5488 5594,5488 ; 86,5764 86,5238 ; 90,4735 5590,4735 ; 586,4988 586,5238 586,5488 ; 608,-2016 608,-687 ; 966,4988 966,5238 966,5488 ; 1308,-2011 1308,-252 1308,-2002 ; 1308,-1752 5594,-1752 ; 1308,-1372 5594,-1372 ; 1308,-752 5594,-751 ; 1688,-1752 1688,-1372 ; 2308,-1752 2902,-1752 2902,-2011 ; 3706,4988 3706,5238 3706,5488 ; 4586,4988 4586,5238 4586,5488 ; 4889,-2016 4889,-1752 ; 5178,-1752 5178,-1372 ; 5594,4988 86,4988 86,5238 ; 5594,5239 86,5238
  lines w10: 87,4736 87,4562 5595,4562 ; 584,4735 584,4988 ; 586,4563 586,4736 ; 966,4562 966,4739 ; 966,4735 966,4988 ; 3704,4564 3704,4736 ; 3705,4735 3705,4988 ; 4586,4561 4586,4736 ; 4586,4735 4586,4988
  text "REVISIONS" at 2221.5,5577.6 h125
  text "DESCRIPTION" at 1967.33,5346.68 h93
  text "DATE" at 4014.03,5346.68 h93
  text "ZONE" at 623,5327 h93
  text "REV" at 246.67,5321.68 h93
  text "A" at 226,5062 h90
  text "Motor Drive / Sense" at 1030,5062 h90
  text "-" at 751.43,5048.43 h125
  text "04-16-09" at 3774,5044 h100
  text "B" at 226,4817 h90
  text "Fixed Routing issue w/ C25, C27" at 1030,4817 h80
  text "05-14-09" at 3774,4799 h100
  text "D" at 225,4610 h90
  text "06/24/09" at 3785,4610 h90
  text "Changed foot print of board" at 1031,4603 h90
  text "Project" at -644.83,-353.55 h63
  text "PROPRIETARY AND CONFIDENTIAL" at -4878,-358 h63.75
  text "THE INFORMATION CONTAINED IN THIS" at -4892,-439 h56.25
  text "DRAWING IS THE SOLE PROPERTY" at -3060,-445 h56.25
  text "Idaho Technology" at 2222,-508 h187.5
  text "REPRODUCTION IN PART OR AS A WHOLE" at -3367,-539 h56.25
  text "OF IDAHO TECHNOLOGY.  ANY" at -4889,-542 h56.25
  text "Plate Cycler" at -629,-563 h150
  text "WITHOUT THE WRITTEN PERMISSION OF" at -4892,-639 h56.25
  text "IDAHO TECHNOLOGY IS PROHIBITED" at -3016,-642 h56.25
  text "390 Wakara Way - Salt Lake City - UT 84108 - (801) 736 - 6354" at 1472,-658 h63.75
  text "BOARD MATERIAL" at -2413.27,-752.8 h30
  text "BOARD THICKNESS" at -1552.27,-752.8 h30
  text "DATE" at 832.72,-769.8 h63
  text "DESIGNER" at -621,-771 h63
  text "SEE NOTES" at -2326,-865 h75
  text "SEE NOTES" at -1497,-875 h75
  text "TITLE" at 1319,-896 h63
  text "MOTOR DRIVE" at 1874,-971 h187.5
  text "SINGAL LAYERS" at -2409,-990 h63
  text "SILK SCREEN" at -1557,-990 h63
  text "SEE NOTES" at -1539,-1098 h75
  text "NUMBER" at 1329,-1131 h63
  text "SLDR MSK" at -2403,-1200 h30
  text "DIMENSIONS" at -1551,-1200 h63
  text "CHECKED" at -665,-1220 h63
  text "PCBS-GEN-0905" at 1878,-1292 h187.5
  text "SEE NOTES" at -1500,-1308 h75
  text "SEE NOTES" at -2349,-1320 h75
  text "SCALE" at -2409,-1422 h63
  text "LAYER ORDER" at -1545,-1428 h63
  text "SIZE" at 1399,-1456 h63
  text "REV." at 5279,-1464 h63
  text "NONE" at -2055,-1530 h75
  text "SEE NOTES" at -1509,-1552 h75
  text "TOLERENCE" at -2409,-1652 h63
  text "QA" at -657,-1652 h63
  text "D" at 5353,-1684 h187.5
  text "A" at 1405.93,-1687.65 h187.5
  text "SEE NOTES" at -2401,-1744 h75
  text "LAYER" at 4932.68,-1821.95 h63
  text "PCBA NUMBER" at 1348.75,-1832.4 h63
  text "LAYER NAME" at 2955,-1832 h63
  text "COPPER WEIGHT" at -2401,-1868 h63
  text "SEE NOTES" at -2236.5,-1969.8 h75
  text "10" at 5383,-1972 h125
  text "OF" at 5147,-1976 h125
Drill Drawing:
  lines w5: -5360,5461 -3110,5461
  lines w10: 0,0 4300,0 4300,3900 4272,3900 0,3900 0,0
  text "Notes: Unless otherwise specified)" at -5360,5511 h70
  text "1. Board to be fabricated to IPC-A-6011 and IPC-6012, class 2 specifications." at -5365,5311 h60
  text "2. Material: Per IPC-4101A/24//26/29/99, copper clad, high temperture" at -5365,5136 h60
  text "FR4 class epoxy glass rated UL94V-0.   Must be RoHS compliant" at -5210,5011 h60
  text "and survive a lead-free assembly max reflow of 260 deg C (6 passes)" at -5210,4886 h60
  text "- Td rating: > 340 Deg C" at -4980,4751 h60
  text "- Z axis CTE< 3.5%" at -4980,4626 h60
  text "- Tg > 170 Deg C (min)" at -4980,4501 h60
  text "3. Finish:  RoHS Approved Hot Air Solder Leveling (HASL), Plated with Immersion" at -5352,4367 h60
  text "Gold over Electrolysis Nickel over copper (NiAu), Plated with Immersion" at -5182,4202 h60
  text "White Tin (IWT), or Plated with Immersion Silver (IAg)." at -5187,4037 h60
  text "4. Solder Mask: SMOBC per IPC-SM-840C, class T, must be RoHS compliant," at -5365,3891 h60
  text "type LPI, green or equivalent." at -5210,3741 h60
  text "5. Silkscreen both sides with non-conductive white, RoHS compliant ink," at -5365,3581 h60
  text "not allowed on component pads or mounting holes." at -5210,3431 h60
  text "6. Hole sizes are after plating." at -5365,3256 h60
  text "7. Maximum allowable board warp or twist will be .005\" per inch, determined" at -5365,3096 h60
  text "by using any of the measurement techniques in IPC-A-600-B." at -5210,2971 h60
  text "9. Vendor may add copper thieving as needed to improve manufacturability." at -5365,2826 h60
  text "10. Level I electrical test required." at -5365,2671 h60
  text "11. Flammability rating, manufacturer's identification and date code" at -5365,2521 h60
  text "shall be rendered in etch on the bottom side of the board." at -5204,2396 h60
  text ".LEGEND" at -5114,523 h60
  text "Drill Drawing." at -5114,372 h60
  text "Drill" at 2934,-1959.99 h120
  text "10" at 4924,-1976 h120

## Text inside footprints (layer, text, board x,y; h text height)
C1: Top Overlay "+" at 2195,2617 h45
C2: Top Overlay "+" at 4081,2757.96 h45 r270
C3: Top Overlay "+" at 1244.75,1183.33 h45 r90
C4: Top Overlay "+" at 1934.75,1183.33 h45 r90
C5: Top Overlay "+" at 3790.25,3582.67 h45 r270
C6: Top Overlay "+" at 3095.25,3582.67 h45 r270
C30: Top Overlay "+" at 1257,3393 h45 r90
C33: Top Overlay "+" at 3257,2079.04 h45 r90
C34: Top Overlay "+" at 1113,1958.04 h45 r90
C35: Top Overlay "+" at 3043.24,1443.58 h45 r90
C36: Top Overlay "+" at 4142.75,1284.33 h45 r90
C37: Top Overlay "+" at 3452.75,1284.33 h45 r90
C38: Top Overlay "+" at 2345.75,1435.33 h45 r90
C45: Top Overlay "+" at 495,3012 h40 r180
J3: Top Overlay "1" at 536,3487 h40
J6: Top Overlay "1" at 1164.25,60 h37.5
J7: Top Overlay "1" at 50,993 h37.5 r270
J8: Top Overlay "1" at 2668.75,60 h37.5
J9: Top Overlay "1" at 1916.5,60 h37.5
J10: Top Overlay "1" at 412,60 h37.5
J11: Top Overlay "1" at 3421,60 h37.5
P1: Top Overlay "1" at 195.75,2026.6 h40 r90; Top Overlay "2" at 117.01,2022.7 h40 r90; Top Overlay "11" at 192,1422 h40 r90; Top Overlay "12" at 113,1412 h40 r90